# EAGLE board avrcp_m (EAGLE 5.04)
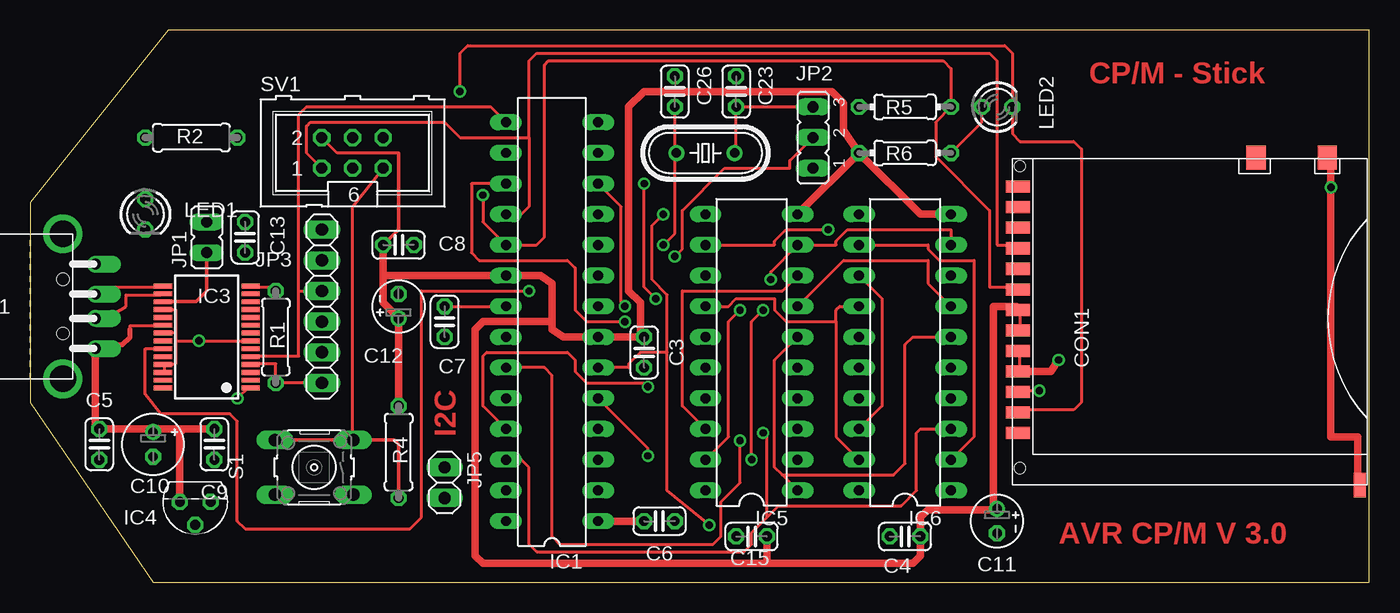
[diagram p0: board, top side]
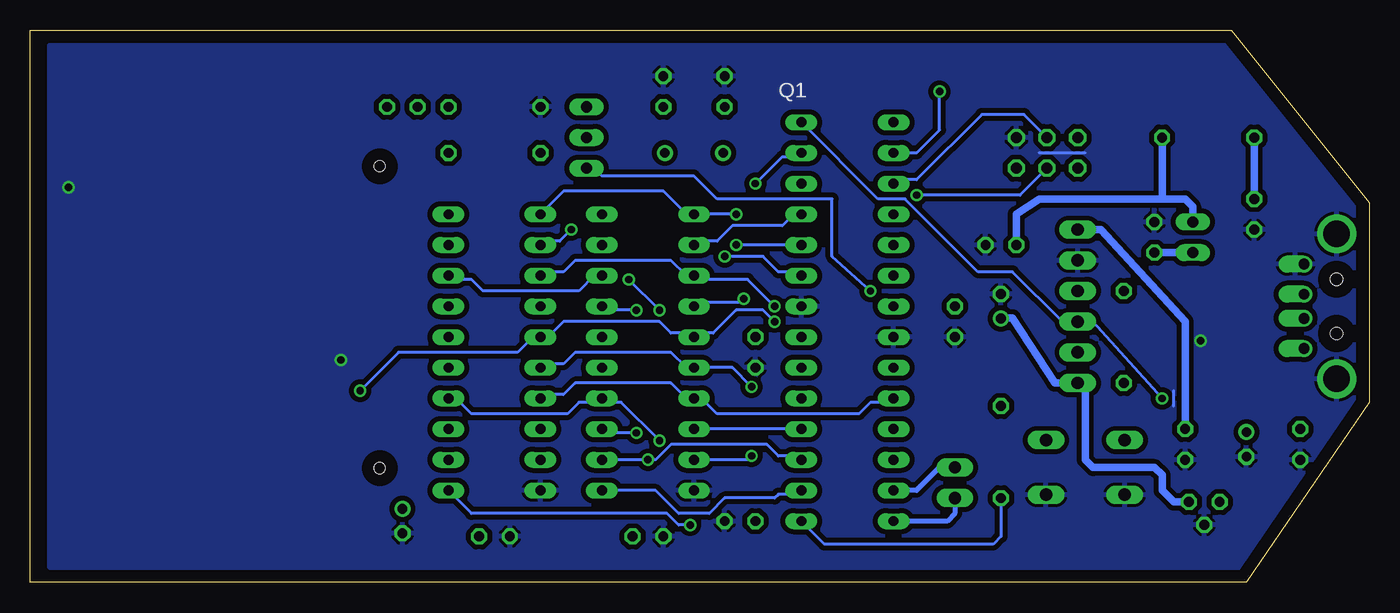
[diagram p1: board, bottom side, seen from below]

Size 110.81 x 45.72 mm. Coordinates in mm from the lower left corner, seen from the top.
Outline: 10.16,0 110.81,0 110.81,45.72 11.43,45.72 0,31.43 0,14.92 10.16,0
Copper layers (1*16): Top 0.035mm / dielectric 1.5mm / Bottom 0.035mm
Design rules "default": minimum track width 10mil, minimum drill 24mil, track to track 8mil, track to pad 8mil, pad to pad 8mil, via to via 8mil, smd to smd 8mil, copper to edge 40mil, drill to drill 8mil, minimum pad ring 10mil, minimum via ring 8mil, stop-mask expansion 4mil, vias tented up to drill 0mil, thermal gap 10mil

## Footprints (pad centres in the part's own frame; a part is rotated, then mirrored left to right if it is on the bottom)
C025-024X044 = drill 0.813 octagon: 1 -1.27,0; 2 1.27,0
E2-5 = drill 0.813 pad 1.27 round: + -1.016,0 | drill 0.813 pad 1.27 octagon: - 1.016,0
E2-4 = drill 0.813 pad 1.27 round: + -1.016,0 | drill 0.813 pad 1.27 octagon: - 1.016,0
SCDA5A0201 = smd 1 x 2: CD 9.475,-0.45; COM 11.175,-0.45; P1 -7.525,-0.45; P2 -5.825,-0.45; P3A -4.125,-0.45; P3B -2.425,-0.45; P4A -0.725,-0.45; P4B 0.975,-0.45; P5 2.675,-0.45; P6 4.375,-0.45; P7 6.075,-0.45; P8 7.775,-0.45; P9 -9.225,-0.45 | smd 2 x 1.6: GND 13.575,-26.05; WP 13.575,-20.15 | smd 2 x 1: GND1 -13.525,-28.75 | hole 0.9: -12.125,-0.6; 12.875,-0.6
DIL28-3 = drill 0.813 long: 1 -16.51,-3.81; 2 -13.97,-3.81; 3 -11.43,-3.81; 4 -8.89,-3.81; 5 -6.35,-3.81; 6 -3.81,-3.81; 7 -1.27,-3.81; 8 1.27,-3.81; 9 3.81,-3.81; 10 6.35,-3.81; 11 8.89,-3.81; 12 11.43,-3.81; 13 13.97,-3.81; 14 16.51,-3.81; 15 16.51,3.81; 16 13.97,3.81; 17 11.43,3.81; 18 8.89,3.81; 19 6.35,3.81; 20 3.81,3.81; 21 1.27,3.81; 22 -1.27,3.81; 23 -3.81,3.81; 24 -6.35,3.81; 25 -8.89,3.81; 26 -11.43,3.81; 27 -13.97,3.81; 28 -16.51,3.81
SSOP28 = smd 0.4 x 1.5: 1 -4.225,-3.625; 2 -3.575,-3.625; 3 -2.925,-3.625; 4 -2.275,-3.625; 5 -1.625,-3.625; 6 -0.975,-3.625; 7 -0.325,-3.625; 8 0.325,-3.625; 9 0.975,-3.625; 10 1.625,-3.625; 11 2.275,-3.625; 12 2.925,-3.625; 13 3.575,-3.625; 14 4.225,-3.625; 15 4.225,3.625; 16 3.575,3.625; 17 2.925,3.625; 18 2.275,3.625; 19 1.625,3.625; 20 0.975,3.625; 21 0.325,3.625; 22 -0.325,3.625; 23 -0.975,3.625; 24 -1.625,3.625; 25 -2.275,3.625; 26 -2.925,3.625; 27 -3.575,3.625; 28 -4.225,3.625
TO92 = drill 0.813 octagon: 1 -1.27,0; 2 0,1.905; 3 1.27,0
DIL20 = drill 0.813 long: 1 -11.43,-3.81; 2 -8.89,-3.81; 3 -6.35,-3.81; 4 -3.81,-3.81; 5 -1.27,-3.81; 6 1.27,-3.81; 7 3.81,-3.81; 8 6.35,-3.81; 9 8.89,-3.81; 10 11.43,-3.81; 11 11.43,3.81; 12 8.89,3.81; 13 6.35,3.81; 14 3.81,3.81; 15 1.27,3.81; 16 -1.27,3.81; 17 -3.81,3.81; 18 -6.35,3.81; 19 -8.89,3.81; 20 -11.43,3.81
JP1 = drill 0.914 long: 1 0,-1.27; 2 0,1.27
JP2 = drill 0.914 long: 1 -2.54,0; 2 0,0; 3 2.54,0
1X06 = drill 1.016 long: 1 -6.35,0; 2 -3.81,0; 3 -1.27,0; 4 1.27,0; 5 3.81,0; 6 6.35,0
1X02 = drill 1.016 long: 1 -1.27,0; 2 1.27,0
LED3MM = drill 0.813 octagon: A -1.27,0; K 1.27,0
HC49/S = drill 0.813 round: 1 -2.413,0; 2 2.413,0
0207/7 = drill 0.813 octagon: 1 -3.81,0; 2 3.81,0
0204/7 = drill 0.813 octagon: 1 -3.81,0; 2 3.81,0
B3F-10XX = drill 1.016 long: 1 -3.251,2.261; 2 3.251,2.261; 3 -3.251,-2.261; 4 3.251,-2.261
ML6 = drill 0.914 octagon: 1 -2.54,-1.27; 2 -2.54,1.27; 3 0,-1.27; 4 0,1.27; 5 2.54,-1.27; 6 2.54,1.27
AWF = drill 0.9 offset: + 5.4,-3.5; - 5.4,3.5; D+ 5.4,1; D- 5.4,-1 | drill 2.2 round: SHIELD1 2.7,6; SHIELD2 2.7,-6 | hole 1: 2.7,2.25; 2.7,-2.25

## Placement (x,y rotation side)
C3  100n  [C025-024X044]  50.8,19.05 270 top
C4  100n  [C025-024X044]  72.39,3.81 0 top
C5  10n  [C025-024X044]  5.71,11.43 90 top
C6  100n  [C025-024X044]  52.07,5.08 180 top
C7  100n  [C025-024X044]  34.29,21.59 270 top
C8  100n  [C025-024X044]  30.48,27.94 0 top
C9  100n  [C025-024X044]  15.24,11.43 90 top
C10  10µ  [E2-5]  10.16,11.43 270 top
C11  4,7µ  [E2-4]  80.01,5.08 270 top
C12  10µ  [E2-4]  30.48,22.86 90 top
C13  100n  [C025-024X044]  17.78,28.57 270 top
C15  100n  [C025-024X044]  59.69,3.81 0 top
C23  27p  [C025-024X044]  58.42,40.64 90 top
C26  27p  [C025-024X044]  53.34,40.64 90 top
CON1  SCDA5A0201  [SCDA5A0201]  81.28,21.59 90 top
IC1  ATmega168  [DIL28-3]  43.18,21.59 90 top
IC3  FT232RL  [SSOP28]  14.61,20.32 90 top
IC4  LP2950ACZ-3.3  [TO92]  13.65,6.67 180 top
IC5  4256  [DIL20]  59.69,19.05 90 top
IC6  4256  [DIL20]  72.39,19.05 90 top
JP1  [JP1]  14.61,28.57 0 top
JP2  Clock Switch  [JP2]  64.77,36.83 90 top
JP3  [1X06]  24.13,22.86 90 top
JP5  [1X02]  34.29,8.26 270 top
LED1  Grün  [LED3MM]  9.53,30.48 270 top
LED2  Gelb  [LED3MM]  80.01,39.37 0 top
Q1  20 MHz  [HC49/S]  55.88,35.56 0 top
R1  10k  [0207/7]  20.32,20.32 270 top
R2  330  [0207/7]  13.33,36.83 0 top
R4  10k  [0207/7]  30.48,10.79 270 top
R5  10k  [0204/7]  72.39,39.37 180 top
R6  330  [0204/7]  72.39,35.56 180 top
S1  Reset  [B3F-10XX]  23.5,9.53 180 top
SV1  ISP  [ML6]  26.67,35.56 0 top
X1  [AWF]  0,22.86 0 top

## Library data of the parts
C3-C13 C15 C23 C26 R1 R2 R4-R6 = rcl
CON1 = SCDA5A0201
IC1 = atmel
IC3 = ftdichip
IC4 = v-reg
IC5 IC6 = memory-hitachi
JP1 JP2 = jumper
JP3 JP5 = pinhead
LED1 LED2 = led
Q1 = crystal
S1 = switch-omron
SV1 = con-harting-ml
X1 = con-berg

## Nets
+3V3: C3.1 C4.2 C8.1 C11.+ C12.+ C15.2 CON1.P4A CON1.P4B IC1.7 IC1.20 IC3.4 IC4.1 IC5.10 IC6.10 JP1.2 JP3.1 R1.2 R2.2 R4.1 R6.2 SV1.2
+5V: C5.2 C9.2 C10.+ IC3.20 IC4.3 JP3.6 X1.+
/CAS: IC1.24 IC5.17 IC6.17
/OE: IC1.25 IC5.16 IC6.16
/RAS: IC1.23 IC5.4 IC6.4
/WE: IC1.26 IC5.3 IC6.3
CS: CON1.P1 IC1.16 LED2.K
D0_A0: IC1.2 IC5.1 IC5.6 IC6.6
D1_A1: IC1.3 IC5.2 IC5.7 IC6.7
D2_A2: IC1.4 IC5.8 IC5.18 IC6.8
D3_A3: IC1.5 IC5.9 IC5.19 IC6.9
D4_A4: IC1.6 IC5.11 IC6.1 IC6.11
D5_A5: IC1.11 IC5.12 IC6.2 IC6.12
D6_A6: IC1.12 IC5.13 IC6.13 IC6.18
D7_A7: IC1.13 IC5.14 IC6.14 IC6.19
GND: C3.2 C4.1 C5.1 C6.1 C7.2 C8.2 C9.1 C10.- C11.- C12.- C13.1 C15.1 C23.2 C26.2 CON1.GND CON1.GND1 CON1.P3A CON1.P3B IC1.8 IC1.22 IC3.7 IC3.18 IC3.21 IC3.25 IC3.26 IC4.2 IC5.20 IC6.20 JP3.5 LED1.K R5.2 S1.1 S1.2 SV1.6 X1.- X1.SHIELD1 X1.SHIELD2
MISO_A9: CON1.P7 IC1.18 SV1.1
MOSI_A8: CON1.P2 IC1.17 IC5.15 IC6.15 SV1.4
N$1: IC3.14 R1.1
N$2: C13.2 IC3.17 JP1.1
N$3: C7.1 IC1.21
N$4: IC1.9 JP2.2
N$5: IC1.27 JP5.1
N$6: IC1.28 JP5.2
N$7: LED1.A R2.1
N$8: IC3.23 JP2.1
N$9: IC3.16 X1.D-
N$10: IC3.15 X1.D+
N$13: LED2.A R6.1
N$23: C26.1 IC1.10 Q1.1
N$24: C23.1 JP2.3 Q1.2
RESET_CPM: C6.2 IC1.1 R4.2 S1.3 S1.4 SV1.5
RXD_AVR: IC1.14 IC3.1 JP3.3
SCK_A10: CON1.P5 IC1.19 R5.1 SV1.3
TXD_AVR: IC1.15 IC3.5 JP3.4

## Tracks (layer width: path | path; a pad name or v marks a point on that pad's centre or on a via)
+3V3
  Top 0.254: 80.01,6.03 C11.+ 80.01,6.35 | CON1.P4A 81.92,20.95 81.92,22.54 CON1.P4B 81.6,22.86 | IC3.4 18.42,18.1 20.32,18.1 R1.2 JP3.1 | C12.+ 30.48,21.91 | SV1.2 25.4,35.56 30.48,35.56 | 50.48,20.32 C3.1
  Top 0.305: 30.48,35.56 30.48,29.21 C8.1
  Top 0.61: 60.96,1.59 73.03,1.59 73.66,2.22 C4.2 73.66,5.4 74.3,6.03 79.69,6.03 | 79.69,6.03 80.01,6.03 | R6.2 IC5.10 | 81.6,22.86 79.69,22.86 79.69,6.03 | R6.2 73.66,30.48 IC6.10 | 79.69,6.03 80.01,6.35 | 29.21,25.4 29.21,23.18 30.48,21.91 | 29.21,25.4 C8.1 | C12.+ R4.1 | 29.21,25.4 IC1.20 42.23,25.4 43.18,24.77 43.18,21.59 | 43.18,21.59 43.18,20.95 44.13,20.32 IC1.7 50.48,20.32 50.48,23.18 49.53,24.13 49.53,39.37 50.8,40.64 66.36,40.64 67.31,39.69 67.31,37.47 R6.2 | 43.18,21.59 37.46,21.59 36.83,20.95 36.83,2.22 37.46,1.59 60.96,1.59 | 60.96,1.59 C15.2
  Bottom 0.254: 30.48,21.91 C12.+
  Bottom 0.61: 30.48,21.91 29.53,21.91 26.04,16.51 JP3.1 23.5,16.51 23.5,10.16 22.86,9.53 17.78,9.53 17.15,8.89 17.15,7.62 16.19,6.67 IC4.1 | C8.1 29.21,30.48 27.31,31.75 17.15,31.75 | 17.15,31.75 R2.2 | 17.15,31.75 15.24,31.75 14.61,31.11 JP1.2
+5V
  Top 0.254: 10.16,12.7 C10.+ | 8.26,20.95 8.26,21.27 10.79,21.27 IC3.20
  Top 0.406: 8.26,20.95 8.26,20.32 7.62,19.68 5.72,19.68 X1.+
  Top 0.61: 12.7,12.7 10.16,12.7 C5.2 5.4,13.02 5.4,19.05 X1.+ | 12.7,12.7 C9.2 | IC4.3 12.38,12.38 12.7,12.7
  Bottom 0.61: JP3.6 22.23,29.21 15.24,21.59 C9.2
/CAS
  Bottom 0.254: IC1.24 39.69,14.92 41.27,14.92 42.23,13.97 53.98,13.97 55.24,15.24 IC5.17 56.52,15.24 57.78,16.51 65.72,16.51 66.68,15.56 68.26,15.56 IC6.17
/OE  (via drill 0.61)
  Top 0.254: IC1.25 37.46,14.61 37.46,18.73 37.78,19.05 44.45,19.05 45.09,18.41 45.09,17.46 46.04,16.51 51.12,16.51 v51.12,16.19
  Bottom 0.254: v51.12,16.19 52.7,17.78 IC5.16 56.52,17.78 57.78,19.05 65.72,19.05 66.68,18.1 68.26,18.1 IC6.16
/RAS  (via drill 0.61)
  Top 0.254: IC1.23 42.54,17.78 43.18,17.14 43.18,3.81 43.81,3.17 56.52,3.17 57.15,3.81 57.15,6.67 58.74,8.26 v58.74,11.75
  Bottom 0.254: 63.82,14.92 65.41,14.92 66.36,13.97 74.3,13.97 75.57,15.24 IC6.4 | v58.74,11.75 61.91,14.92 63.82,14.92 | 63.82,14.92 IC5.4
/WE  (via drill 0.61)
  Top 0.254: IC1.26 40.64,10.16 41.27,9.53 41.27,3.17 41.91,2.54 59.05,2.54 59.69,3.17 59.69,4.13 60.96,5.4 | 60.96,5.4 61.91,6.35 72.07,6.35 73.34,7.62 73.34,12.38 73.66,12.7 IC6.3 | v60.64,12.38 60.96,12.06 60.96,5.4
  Bottom 0.254: IC5.3 63.18,12.38 v60.64,12.38
CS  (via drill 0.61)
  Top 0.254: v35.56,40.64 35.56,43.81 36.2,44.45 80.65,44.45 81.28,43.81 LED2.K 81.28,37.15 81.92,36.51 86.36,36.51 87,35.88 87,14.92 86.36,14.29 81.92,14.29 CON1.P1
  Bottom 0.254: v35.56,40.64 35.56,37.47 37.46,35.56 IC1.16
D0_A0
  Top 0.254: IC5.6 61.59,18.41 61.59,9.53 62.23,8.89 | IC5.1 62.23,8.89 | IC6.6 73.03,20.32 72.39,19.68 72.39,9.84 71.44,8.89 62.23,8.89
  Bottom 0.254: IC1.2 47.31,7.3 48.89,7.3 49.21,6.99 53.34,6.99 54.61,5.71 57.15,5.71 59.05,7.62 IC5.1
D1_A1  (via drill 0.61)
  Top 0.254: IC5.7 67.31,26.67 74.3,26.67 74.3,24.77 IC6.7 | v60.64,22.54 59.69,21.59 v59.69,10.16
  Bottom 0.254: IC1.3 47.31,10.48 48.89,10.48 49.85,11.43 57.78,11.43 59.05,10.16 v59.69,10.16 IC5.2 | IC5.7 63.18,22.54 v60.64,22.54
D2_A2
  Top 0.254: IC5.8 62.23,24.13 53.98,24.13 53.98,14.61 IC5.18
  Bottom 0.254: IC1.4 IC5.18 | IC6.8 75.88,25.08 74.3,25.08 73.34,24.13 65.41,24.13 64.14,25.4 IC5.8
D3_A3  (via drill 0.61)
  Top 0.254: IC6.9 76.2,29.21 67.63,29.21 66.68,28.26 66.68,27.94 IC5.9 61.28,25.72 v61.28,25.08 | IC1.5 51.12,11.11 v51.12,10.48 | v58.74,22.54 57.78,21.59 57.78,12.06 IC5.19
  Bottom 0.254: v51.12,10.48 51.43,10.16 IC5.19 | v58.74,22.54 v61.28,25.08
D4_A4  (via drill 0.61)
  Top 0.254: IC1.6 49.53,17.78 49.53,18.1 50.48,19.05 52.7,19.05 | 52.7,19.05 52.7,7.62 v56.2,4.76 | v52.39,30.48 51.43,29.53 51.43,25.08 52.7,23.81 52.7,19.05
  Bottom 0.254: IC6.11 66.68,32.38 58.42,32.38 56.52,30.48 IC5.11 v52.39,30.48 | IC6.1 74.3,5.71 58.1,5.71 57.15,4.76 v56.2,4.76
D5_A5  (via drill 0.61)
  Top 0.254: IC6.12 74.3,27.94 74.3,27.62 75.25,26.67 78.11,26.67 78.11,12.06 IC6.2 | IC5.12 61.59,27.94 61.59,28.26 62.55,29.21 v66.04,29.21
  Bottom 0.254: IC5.12 55.56,28.26 53.98,28.26 52.7,29.53 48.58,29.53 47.62,30.48 IC1.11 | v66.04,29.21 66.99,28.26 68.26,28.26 IC6.12
D6_A6  (via drill 0.61)
  Top 0.254: IC6.18 70.48,14.61 70.48,23.5 IC6.13 | IC1.12 48.89,31.11 48.89,23.18 v49.21,22.86
  Bottom 0.254: IC6.13 68.26,25.72 66.68,25.72 65.72,26.67 57.78,26.67 56.52,25.4 IC5.13 55.56,25.08 51.43,25.08 v49.21,22.86
D7_A7  (via drill 0.61)
  Top 0.254: IC5.14 57.78,22.86 58.42,23.5 61.59,23.5 61.59,22.54 62.55,21.59 66.68,21.59 | 66.68,21.59 66.68,22.54 66.99,22.86 IC6.14 | IC6.19 66.68,12.06 66.68,21.59 | v50.8,33.02 50.8,24.45 v51.75,23.5
  Bottom 0.254: IC1.13 47.31,35.24 48.58,35.24 v50.8,33.02 | v51.75,23.5 52.07,23.18 55.56,23.18 IC5.14
GND  (via drill 0.61)
  Top 0.254: 11.11,18.1 11.11,17.46 IC3.26 | 12.06,20.64 11.11,20.64 IC3.21 | 12.06,20.64 12.06,22.54 11.11,22.54 IC3.18 | 12.06,20 v13.97,20 18.1,20 IC3.7 | 12.06,20 12.06,20.64 | 11.11,18.1 12.06,18.1 12.06,20 | 11.11,18.1 IC3.25 | 107.32,35.24 CON1.GND 107.63,34.92 | CON1.P3B 81.92,19.05 81.92,17.78 CON1.P3A 81.6,17.46 | CON1.GND1 110.17,8.89
  Top 0.61: 107.63,34.92 v107.63,32.7 107.63,12.06 109.86,12.06 109.86,8.24 CON1.GND1 | 81.6,17.46 84.45,17.46 v85.09,18.41
  Bottom 0.254: 23.5,35.56 27.31,35.56 | 16.19,14.61 16.19,15.88
  pour Bottom (isolate 0.406): 1.27,44.45 109.22,44.45 109.22,1.27 1.27,1.27
MISO_A9
  Top 0.254: 41.27,36.83 41.27,31.11 40.64,30.48 IC1.18 | 41.27,36.83 41.27,43.18 41.91,43.81 79.38,43.81 80.01,43.18 80.01,27.94 81.6,27.94 CON1.P7 | SV1.1 22.86,35.56 22.86,37.78 23.18,38.1 34.29,38.1 35.56,36.83 41.27,36.83
MOSI_A8  (via drill 0.61)
  Top 0.254: v83.5,15.88 81.92,15.88 CON1.P2 | IC1.17 36.51,33.02 36.51,27.3 37.15,26.67 44.45,26.67 45.09,26.04 45.09,22.54 46.04,21.59 v49.21,21.59
  Bottom 0.254: IC1.17 39.05,33.34 37.46,33.34 32.07,38.73 28.58,38.73 SV1.4 | v83.5,15.88 80.33,19.05 70.48,19.05 69.22,20.32 IC6.15 67.95,20.32 66.68,21.59 58.74,21.59 57.78,20.64 56.2,20.64 | v49.21,21.59 50.16,22.54 52.39,22.54 54.29,20.64 56.2,20.64 | 56.2,20.64 IC5.15
N$1
  Top 0.254: R1.1 20.32,24.45 18.42,24.45 IC3.14
N$2
  Top 0.305: IC3.17 13.72,23.25 14.61,24.13 JP1.1
  Bottom 0.61: JP1.1 C13.2
N$3
  Top 0.254: C7.1 IC1.21
N$4  (via drill 0.61)
  Top 0.254: v53.34,26.99 53.98,27.62 53.98,30.8 57.47,34.29 62.86,34.29 62.86,34.92 JP2.2
  Bottom 0.254: IC1.9 47.31,25.72 48.89,25.72 50.16,26.99 v53.34,26.99
N$5
  Bottom 0.406: IC1.27 37.46,7.62 35.56,9.53 JP5.1
N$6
  Bottom 0.406: IC1.28 34.92,5.08 34.29,5.71 JP5.2
N$7
  Bottom 0.61: LED1.A R2.1
N$8  (via drill 0.61)
  Top 0.254: v41.27,24.13 32.38,24.13 32.38,5.4 31.43,4.45 17.78,4.45 17.15,5.08 17.15,13.34 16.51,13.97 10.79,13.97 9.53,15.56 9.53,19.37 10.79,19.37 IC3.23
  Bottom 0.254: v41.27,24.13 44.45,26.99 44.45,31.75 53.98,31.75 55.88,33.66 63.5,33.66 64.14,34.29 JP2.1
N$9
  Top 0.254: IC3.16 10.79,23.81 7.94,23.81 7.94,22.86 6.35,21.91 5.71,21.91 X1.D-
N$10
  Top 0.254: IC3.15 10.79,24.45 5.71,24.45 5.71,24.13 X1.D+
N$13
  Top 0.254: R6.1 78.74,38.1 LED2.A
N$23  (via drill 0.61)
  Top 0.254: v52.39,27.94 53.34,28.89 53.34,35.56 | 53.34,35.56 C26.1 | 53.34,35.56 Q1.1
  Bottom 0.254: IC1.10 v52.39,27.94
N$24
  Top 0.254: Q1.2 58.42,35.56 C23.1 JP2.3
RESET_CPM
  Top 0.254: SV1.5 26.67,31.11 26.67,19.05 26.67,12.06 S1.3
  Top 0.305: S1.4 S1.3 30.12,11.79 30.48,11.43 R4.2
  Top 0.61: IC1.1 C6.2
  Bottom 0.254: IC1.1 45.09,3.17 31.12,3.17 30.48,3.81 R4.2
RXD_AVR  (via drill 0.61)
  Top 0.254: v17.15,15.24 18.1,16.19 IC3.1
  Bottom 0.254: v17.15,15.24 22.86,21.59 JP3.3 25.4,21.59 29.53,25.72 32.38,25.72 38.42,31.75 40.64,31.75 IC1.14
SCK_A10  (via drill 0.61)
  Top 0.254: CON1.P5 81.6,24.45 79.38,24.45 79.38,30.8 74.93,35.24 74.93,38.1 R5.1 76.2,42.55 75.57,43.18 42.86,43.18 42.54,42.86 42.54,28.57 41.91,27.94 IC1.19 37.46,29.84 v37.46,32.07
  Bottom 0.254: SV1.3 28.89,32.07 v37.46,32.07
TXD_AVR
  Top 0.254: 22.23,24.13 22.23,18.73 18.42,18.73 IC3.5 | 22.23,24.13 JP3.4 | IC1.15 38.1,39.37 22.86,39.37 22.23,38.73 22.23,24.13

## Text on the board
Top: CP/M - Stick | I2C | AVR CP/M V 3.0